# Altium PCB FBB_PCB.PcbDoc
Units mil, origin at the board's own origin, x right, y up, seen from the top; angles counter-clockwise.
Board outline 3031.9 x 2481 mil, 2 copper layers (Top Layer, Bottom Layer); 2 components, 4 nets, 27 pads, 206 vias.
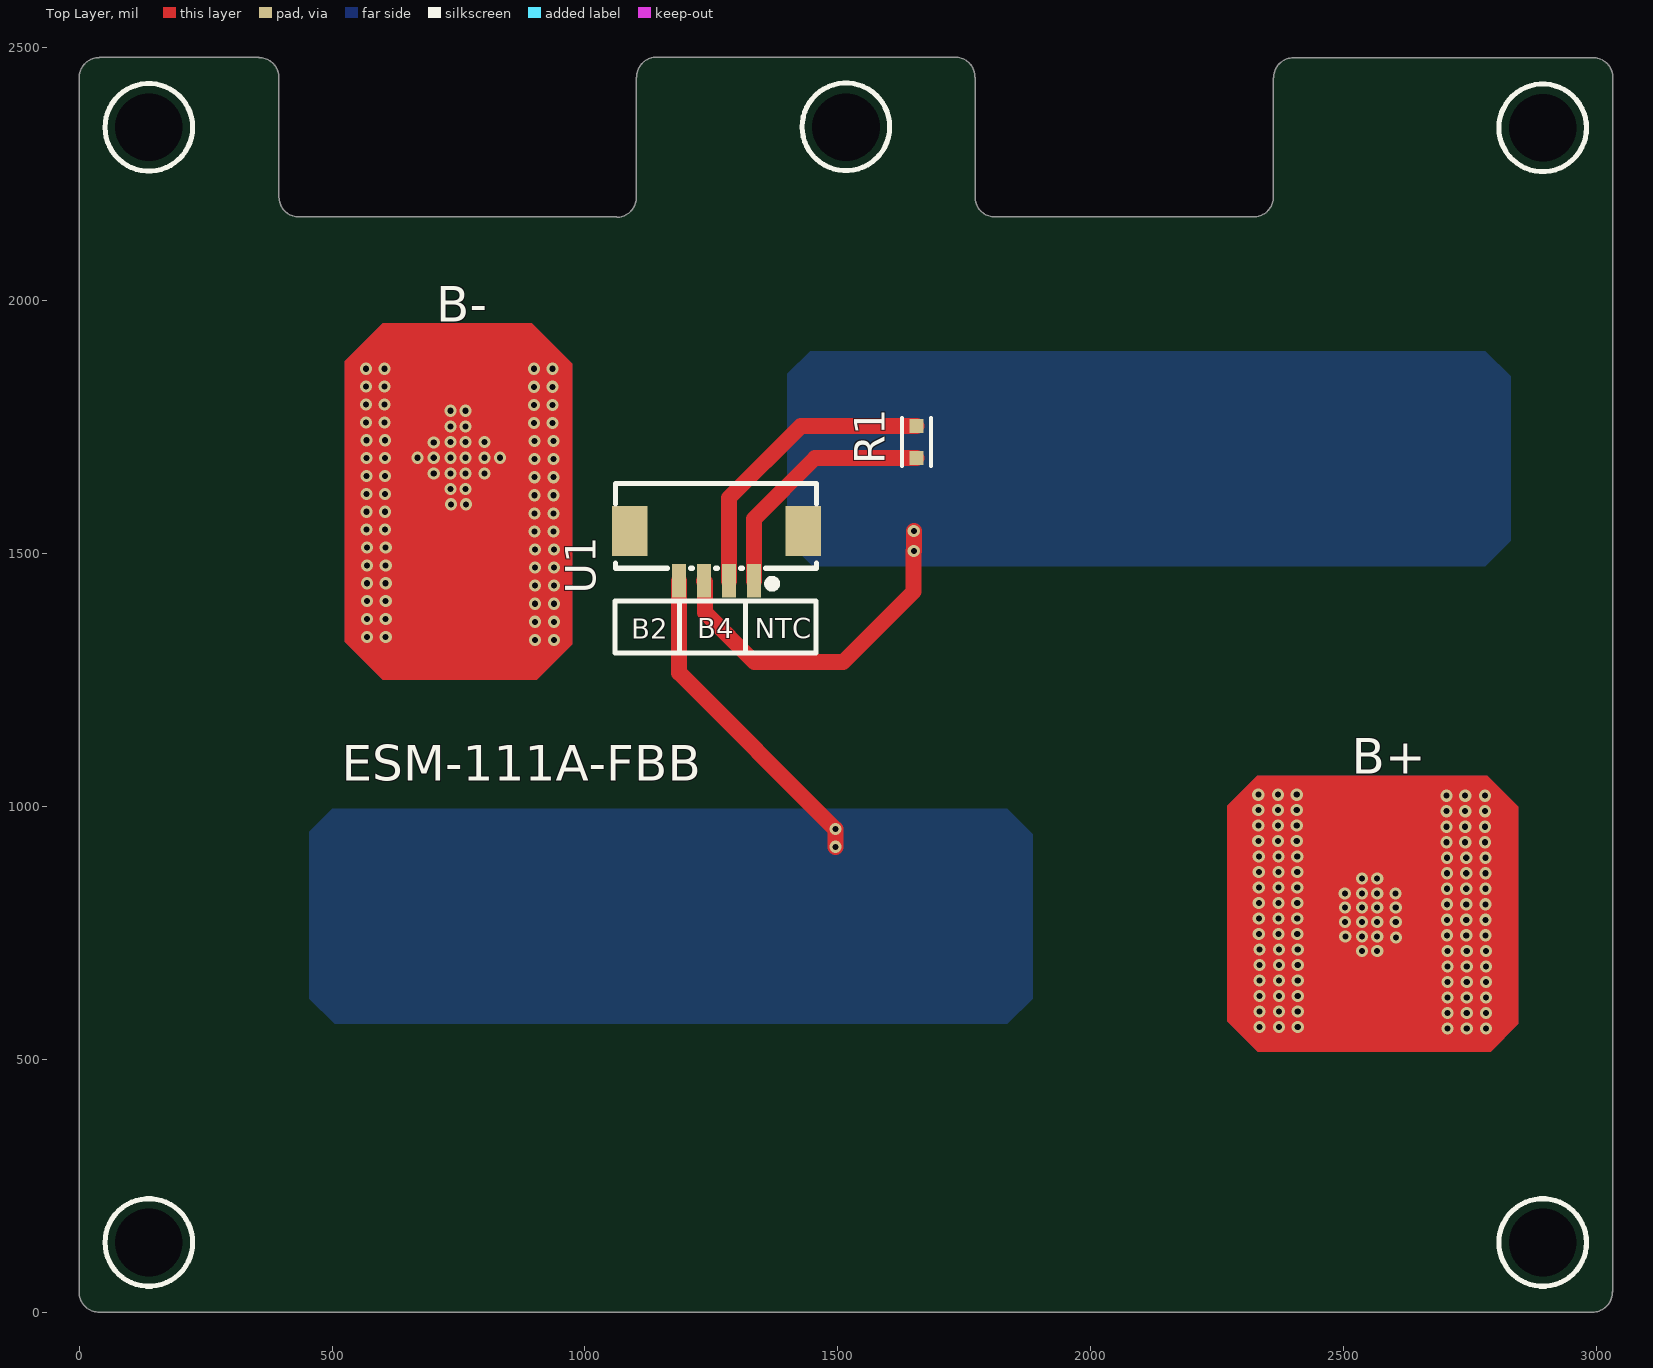
[diagram p0: Top Layer view]
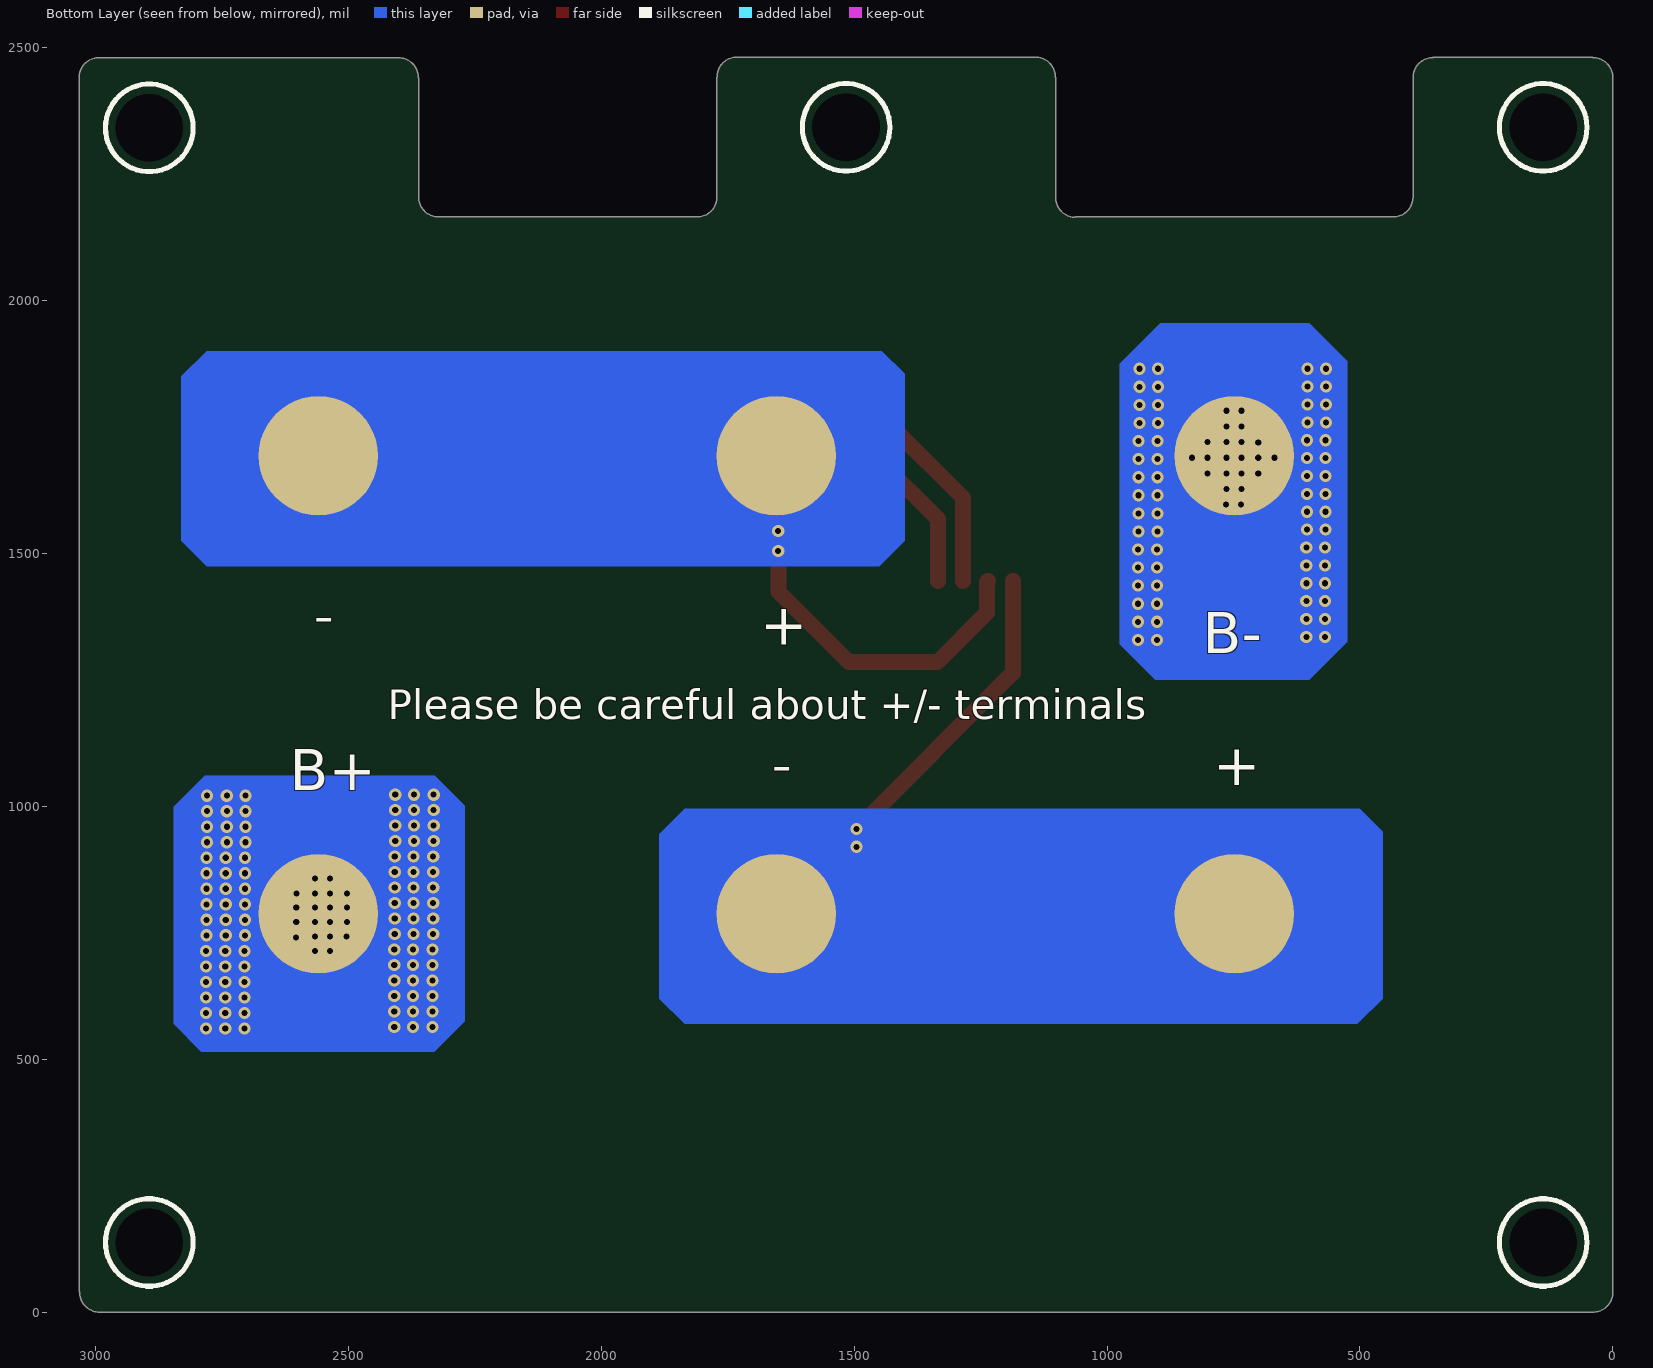
[diagram p1: Bottom Layer view, seen from below]

## Layer stack, top to bottom
Top Solder: solder mask 0.4, Solder Resist, Dk 3.5
Top Layer: signal copper 1.4
Dielectric 1: dielectric 12.6, FR-4, Dk 4.8
Bottom Layer: signal copper 1.4
Bottom Solder: solder mask 0.4, Solder Resist, Dk 3.5

## Board outline
0.1,39.37 ccw(c39.37,39.37) 40,0.1 39.37,0 2992.13,0 2991.63,0.1 ccw(c2991.63,39.37) 3030.9,40 3031.5,39.37 3031.5,2440.94 3031.9,2440.63 ccw(c2992.63,2440.63) 2992,2479.9 2990,2480 2400,2480 2400.37,2479.72 ccw(c2400.37,2440.45) 2361.1,2439.82 2361,2440.45 2361,2204.48 2360.9,2205.11 cw(c2321.63,2204.48) 2321.63,2165.2 2320,2165 1811,2165 1811,2165.1 cw(c1810.37,2204.37) 1771.1,2204.37 1771,2204.37 1771,2441.63 1770.9,2441.63 ccw(c1731.63,2441.63) 1731,2480.9 1731,2481 1141,2481 1141.37,2480.9 ccw(c1141.37,2441.63) 1102.1,2441 1101.71,2441.34 1101.71,2203.66 1101.61,2204.29 cw(c1062.34,2203.66) 1062.34,2164.39 1063,2165 435,2165 435,2165.1 cw(c434.37,2204.37) 395.1,2204.37 395,2204.41 395,2440.63 394.9,2440.63 ccw(c355.63,2440.63) 355,2479.9 355.63,2480.31 39.37,2480.31 39.37,2479.9 ccw(c39.37,2440.63) 0.1,2440 0,2440.94

## Design rules (kind name [scope] priority, off if disabled: settings)
Clearance [All] p1: gap=10 ignorepadtopadclearanceinfootprint=FALSE
PolygonConnect [All] p1: connectstyle=Direct reliefconductorwidth=10 reliefentries=4 polygonreliefangle="90 Angle" airgapwidth=10
RoutingVias [All] p1: holewidth=12 width=24 viastyle="Through Hole" minholewidth=12 minwidth=24 maxholewidth=28 maxwidth=50
SilkToSolderMaskClearance [IsPad] p1: minsilkscreentomaskgap=4 clearancetoexposedcopper=FALSE
SolderMaskExpansion [All] p1: expansion=4 istentingtop=FALSE
Width [All] p1: maxlimit=314.96 minlimit=10 preferedwidth=10
29 further rules are at their usual default settings.

## Components (designator, comment, footprint, x,y, rotation, side; value= is the part's Value field where it differs from the comment)
R1 "ERT-J1VG103FA" FP-ERTJ1-MFG 1655,1720 r90 top
U1 "WAFER-MX1.25-4PWB" CONN-SMD_4P-P1.25_WAFER-MX1.25-4PWB 1260,1495 r180 top

## Footprints (in the part's own frame and the unit in brackets; to place one, negate y for a bottom-side part, rotate by r counter-clockwise, add the part's x,y. Pads: shape width x height; smd on the part's side, far side on the other; paste and mask are expansions set on the pad)
CONN-SMD_4P-P1.25_WAFER-MX1.25-4PWB [mm]
  rect 0.7x1.7 smd paste+0 mask+0.05: 1(-1.875,1.25) 2(-0.625,1.25) 3(0.625,1.25) 4(1.875,1.25)
  rect 1.8x2.5 smd paste+0 mask+0.05: 5(4.355,-1.25) 6(-4.355,-1.25)
  silkscreen extent -5.02,-3.64 5.07,1.6
FP-ERTJ1-MFG [mm]
  rect 0.7x0.7 smd paste+0 mask+0: 1(-0.8,0) 2(0.8,0)
  silkscreen extent -1.2,-0.72 1.2,0.72, body extent -1.25,-0.55 1.25,0.55, height 0.25

## Part data
R1: library part CMP-05419-000001-1, "THERMISTOR NTC 10KOHM 3380K 0603", Case Code (Imperial)=0603, Case Code (Metric)=1608, Max Operating Temperature=125°C, Max Power Dissipation=100mW, Min Operating Temperature=-40°C, Package Quantity=4000, Resistance=10kR, Resistance Tolerance=1%, Accuracy=1%, Case/Package=0603, Depth=0.8mm, Height=0.8mm, Lead Free="Lead Free", Length=1.6mm, Mount="Surface Mount", Number of Pins=2, Packaging="Tape and Reel", Power Rating=100mW, Radiation Hardening=No, REACH SVHC="No SVHC", RoHS Compliant=Yes, Series=ERT-J, Termination=SMD/SMT, Tolerance=1%, Width=800um
U1: library part CMP-012-000000-1, Color=Beige, Current Rating=1A, Flame Retardant Rating=-, JLCPCB Part Class="Extended Part", LCSC Part Name="1x4P 间距:1.25mm 卧贴 系列:PicoBlade(MX 1.25)", Manufacturer=XUNPU(讯普), Operating Temperature=-25℃~+85℃, Voltage Rating=125V, Add into BOM=yes, Contact Material=Brass, Contact Plating=Tin, Convert to PCB=yes, Datasheet=https://item.szlcsc.com/datasheet/WAFER-MX1.25-4PWB/3561373.html, Design Item ID=WAFER-MX1.25-4PWB, Device=WAFER-MX1.25-4PWB, Manufacturer Part=WAFER-MX1.25-4PWB, Mounting Type="Surface Mount, Right Angle", Number of Pins=4P, Number of PINs Per Row=4, Number of Rows=1, Pins Structure=1x4P, Pitch=1.25mm, Plastic Material=LCP, Reference Series="PicoBlade(MX 1.25)", Row Spacing=-, Source=FBB.SchLib, Supplementary Features="Auxiliary Solder Pin", Supplier Footprint=SMD,P=1.25mm,卧贴, Supplier Part=C3029361, Symbol=WAFER-MX1.25-4PWB, X-Length of Bottom Edge on Board (Spacing Line)=10mm, Y-Width of Bottom Edge on Board=5.25mm, Z-Height of the Board=3.6mm

## Free pads (board coordinates)
  round 236.22 smd far side: 8(748.03,787.4) 8(748.03,1692.91) 8(1653.54,787.4) 8(1653.54,1692.91) 8(2559.06,787.4) 8(2559.06,1692.91)
  rrect50% 236.22x500 on Top Solder paste+0 mask+4: 9(750,1605) 9(2559.06,787.4)
  rrect50% 236.22x500 on Top Paste paste+0 mask+4: 9(750,1605) 9(2559.06,787.4)
  rrect50% 590.55x78.74 on Bottom Solder paste+0 mask+4: 10(1199,715) 10(1199,859) 10(2103.63,1623.2) 10(2103.63,1767.2)
  round 60 hole 133.86 unplated: 11(137.8,137.8) 11(137.8,2342.2) 11(1515.75,2342.2) 11(2893.2,137.8) 11(2893.2,2341.2)

## Via types
v1: diameter 24, hole 12, Top Layer to Bottom Layer, 206 vias

## Nets (pads, with @x,y where several pads share a name; then routed paths per layer and width w, separated by ;. In a path a pad name is that pad's centre, name@x,y a point inside that pad or via, vN(x,y) a via of type N, cw(c..) or ccw(c..) an arc to the next point about the centre after c; other vN are vias at no path point)
NetR1_1: R1.1 U1.1 | length 493.1
  Top Layer w31.5: U1.1 1333.82,1567.64 1454.69,1688.5 R1.1
NetR1_2: R1.2 U1.2 | length 593
  Top Layer w31.5: U1.2 1284.61,1609.61 1426.5,1751.5 R1.2
NetU1_3: pad.8@1653.54,1692.91 pad.8@2559.06,1692.91 U1.3 | length 694
  Top Layer w31.5: U1.3 1237.37,1443.82 1237.37,1382.63 1335,1285 1510,1285 1649.4,1424.4 1649.4,1504.4 v1(1650,1505) v1(1650,1544)
NetU1_4: pad.8@748.03,787.4 pad.8@1653.54,787.4 U1.4 | length 653.7
  Top Layer w31.5: U1.4 1186.18,1263.82 v1(1495,955) v1(1495,920)
pads on no net: U1.5 U1.6
copper on no net:
  other v1: 2705,561 2743,561 2781,561 2333,564 2372,564 2409,564 2705,591.67 2743,591.67 2781,591.67 2333,594.6 2372,594.6 2409,594.6 2705,622.33 2743,622.33 2781,622.33 2333,625.2 2372,625.2 2409,625.2 2705,653 2743,653 2781,653 2333,655.8 2372,655.8 2409,655.8 2705,683.67 2743,683.67 2781,683.67 2333,686.4 2372,686.4 2409,686.4 2536,714 2566,714 2705,714.33 2743,714.33 2781,714.33 2333,717 2372,717 2409,717 2603,741 2503,743 2536,743 2566,743 2704,745 2742,745 2780,745 2332,747.6 2371,747.6 2408,747.6 2502.67,771 2536,771 2566,771 2602.67,771 2704,775.67 2742,775.67 2780,775.67 2332,778.2 2371,778.2 2408,778.2 2502.67,800 2536,800 2566,800 2602.67,800 2704,806.33 2742,806.33 2780,806.33 2332,808.8 2371,808.8 2408,808.8 2502,828 2536,828 2566,828 2602,828 2704,837 2742,837 2780,837 2332,839.4 2371,839.4 2408,839.4 2536,857 2566,857 2704,867.67 2742,867.67 2780,867.67 2332,870 2371,870 2408,870 2704,898.33 2742,898.33 2780,898.33 2332,900.6 2371,900.6 2408,900.6 2703,929 2740,929 2779,929 2331,931.2 2370,931.2 2407,931.2 2703,959.67 2740,959.67 2779,959.67 2331,961.8 2370,961.8 2407,961.8 2703,990.33 2740,990.33 2779,990.33 2331,992.4 2370,992.4 2407,992.4 2703,1021 2740,1021 2779,1021 2331,1023 2370,1023 2407,1023 901,1329 939,1329 569,1335 606,1335 901,1364.73 939,1364.73 569,1370.33 606,1370.33 901,1400.47 939,1400.47 569,1405.67 606,1405.67 901,1436.2 939,1436.2 569,1441 606,1441 901,1471.93 939,1471.93 569,1476.33 606,1476.33 901,1507.67 939,1507.67 569,1511.67 606,1511.67 900,1543.4 938,1543.4 568,1547 605,1547 900,1579.13 938,1579.13 568,1582.33 605,1582.33 735,1597 765,1597 900,1614.87 938,1614.87 568,1617.67 605,1617.67 734,1627 764,1627 900,1650.6 938,1650.6 568,1653 605,1653 701,1658 734,1658 764,1658 801,1658 900,1686.33 938,1686.33 568,1688.33 605,1688.33 669,1689 701,1689 734,1689 764,1689 801,1689 832,1689 701,1719 734,1720 764,1720 801,1720 900,1722.07 938,1722.07 568,1723.67 605,1723.67 734,1751 764,1751 899,1757.8 936,1757.8 567,1759 604,1759 734,1782 764,1782 567,1794.33 604,1794.33 899,1793.53 936,1793.53 899,1829.27 936,1829.27 567,1829.67 604,1829.67 567,1865 604,1865 899,1865 936,1865

## Other copper
Top Layer:
  region: 2329.15,1060 2270,1000.85 2270,575 2330,515 2790,515 2845,570 2845,998.96 2783.96,1060
  region: 600,1955 525,1880 525,1325 600,1250 905,1250 975,1320 975,1875 895,1955
Bottom Layer:
  region: 600,1955 525,1880 525,1325 600,1250 905,1250 975,1320 975,1875 895,1955
  region net NetU1_3: 1445,1900 1400,1855 1400,1525 1450,1475 2780,1475 2830,1525 2830,1850 2780,1900
  region net NetU1_4: 500,995 455,950 455,620 505,570 1835,570 1885,620 1885,945 1835,995
  region: 2329.15,1060 2270,1000.85 2270,575 2330,515 2790,515 2845,570 2845,998.96 2783.96,1060

## Silkscreen, mask and mechanical layers (free items; w line width, h text height)
Top Overlay:
  circle w10: c1515.75,2343.2 r86.61
  circle w10: c2893.2,137.8 r86.61
  circle w10: c2893.2,2341.2 r86.61
  circle w10: c137.8,2342.2 r86.61
  circle w10: c137.8,137.8 r86.61
  lines w10: 1187,1303 1317,1303 ; 1187,1303 1187,1406 ; 1187,1303 1059,1303 1059,1406 1187,1406 ; 1187,1303 1187,1406 ; 1187,1406 1317,1406 ; 1317,1303 1457,1303 1457,1406 1317,1406 ; 1317,1303 1317,1406 ; 1317,1303 1317,1406
  text "B-" at 706,1934 h120
  text "B4" at 1222,1332 h40
  text "NTC" at 1336,1332 h40
  text "B2" at 1091,1331 h40
  text "B+" at 2516,1041 h120
  text "ESM-111A-FBB" at 519,1026.42 h120
Bottom Overlay:
  circle w10: c2893.2,137.8 r86.61
  circle w10: c2893.2,2341.2 r86.61
  circle w10: c1515.75,2342.2 r86.61
  circle w10: c137.8,2342.2 r86.61
  circle w10: c137.8,137.8 r86.61
  text "-" at 2568,1313.09 h140
  text "+" at 1685,1293.07 h140
  text "B-" at 810.71,1276 h140
  text "Please be careful about +/- terminals" at 2422,1152.11 h100
  text "-" at 1663.13,1019.09 h140
  text "+" at 790,1015.07 h140
  text "B+" at 2616,1004.76 h140
Mechanical 1:
  lines w10: 0,39.37 0,2440.94 ; 0.1,39.37 ccw(c39.37,39.37) 40,0.1 ; 0.1,2440 cw(c39.37,2440.63) 39.37,2479.9 ; 39.37,0 2992.13,0 ; 39.37,2480.31 355.63,2480.31 ; 355,2479.9 cw(c355.63,2440.63) 394.9,2440.63 ; 395,2204.41 395,2440.63 ; 395.1,2204.37 ccw(c434.37,2204.37) 435,2165.1 ; 435,2165 1063,2165 ; 1062.34,2164.39 ccw(c1062.34,2203.66) 1101.61,2204.29 ; 1101.71,2203.66 1101.71,2367.16 1101.71,2441.34 ; 1102.1,2441 cw(c1141.37,2441.63) 1141.37,2480.9 ; 1141,2481 1731,2481 ; 1731,2480.9 cw(c1731.63,2441.63) 1770.9,2441.63 ; 1771,2204.37 1771,2441.63 ; 1771.1,2204.37 ccw(c1810.37,2204.37) 1811,2165.1 ; 1811,2165 2320,2165 ; 2321.63,2165.2 ccw(c2321.63,2204.48) 2360.9,2205.11 ; 2361,2204.48 2361,2440.45 ; 2361.1,2439.82 cw(c2400.37,2440.45) 2400.37,2479.72 ; 2400,2480 2990,2480 ; 2991.63,0.1 ccw(c2991.63,39.37) 3030.9,40 ; 2992,2479.9 cw(c2992.63,2440.63) 3031.9,2440.63 ; 3031.5,39.37 3031.5,2440.94

## Dimensions
137.8,137.8 to 0,39.37 on Mechanical 6
0,2440.94 to 2361,2440.45 on Mechanical 6
0,2440.94 to 1771,2204.37 on Mechanical 6
0,2440.94 to 1101.71,2203.66 on Mechanical 6
0,2440.94 to 395,2204.41 on Mechanical 6
0,2330 to 3032,2333 on Mechanical 6
0,0 to 40,2480 on Mechanical 6